# Allegro board C074P02-IPCAM-G1-B01.brd
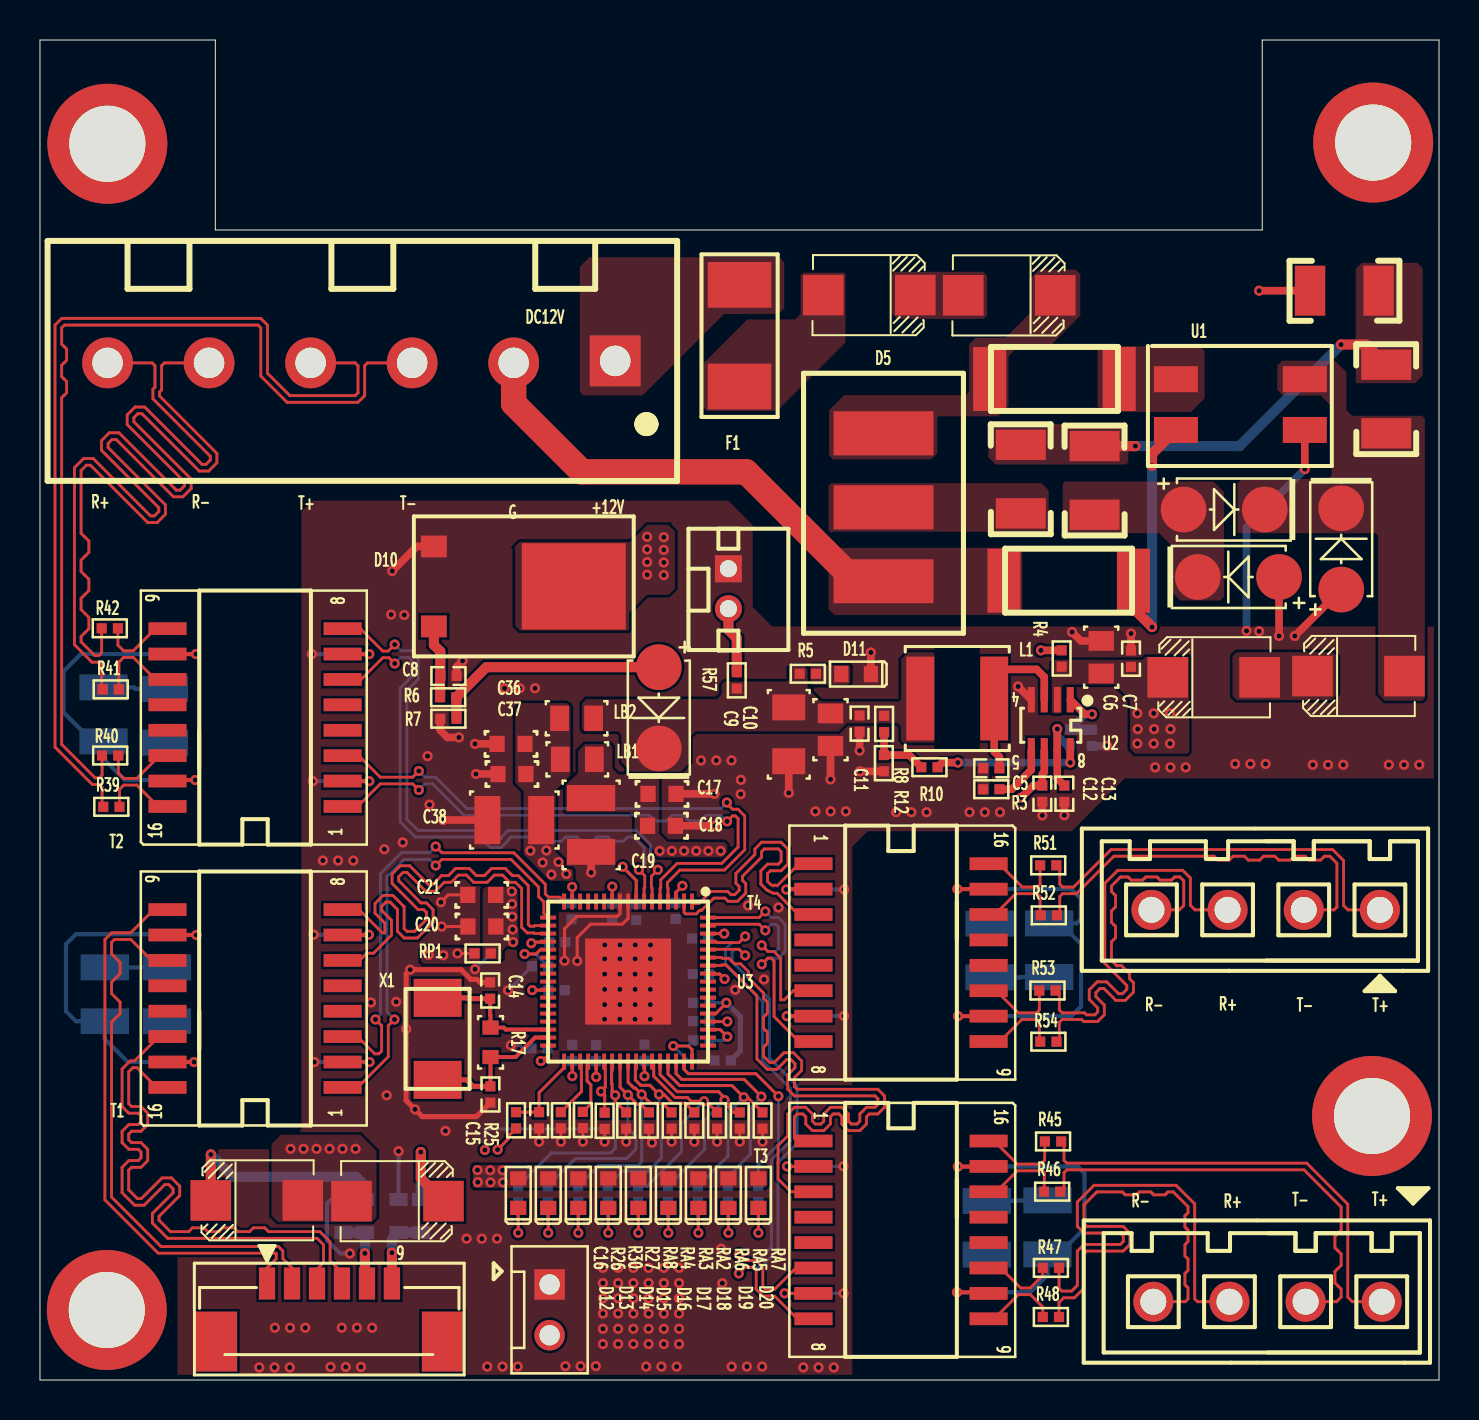
[diagram p0: board, top side]
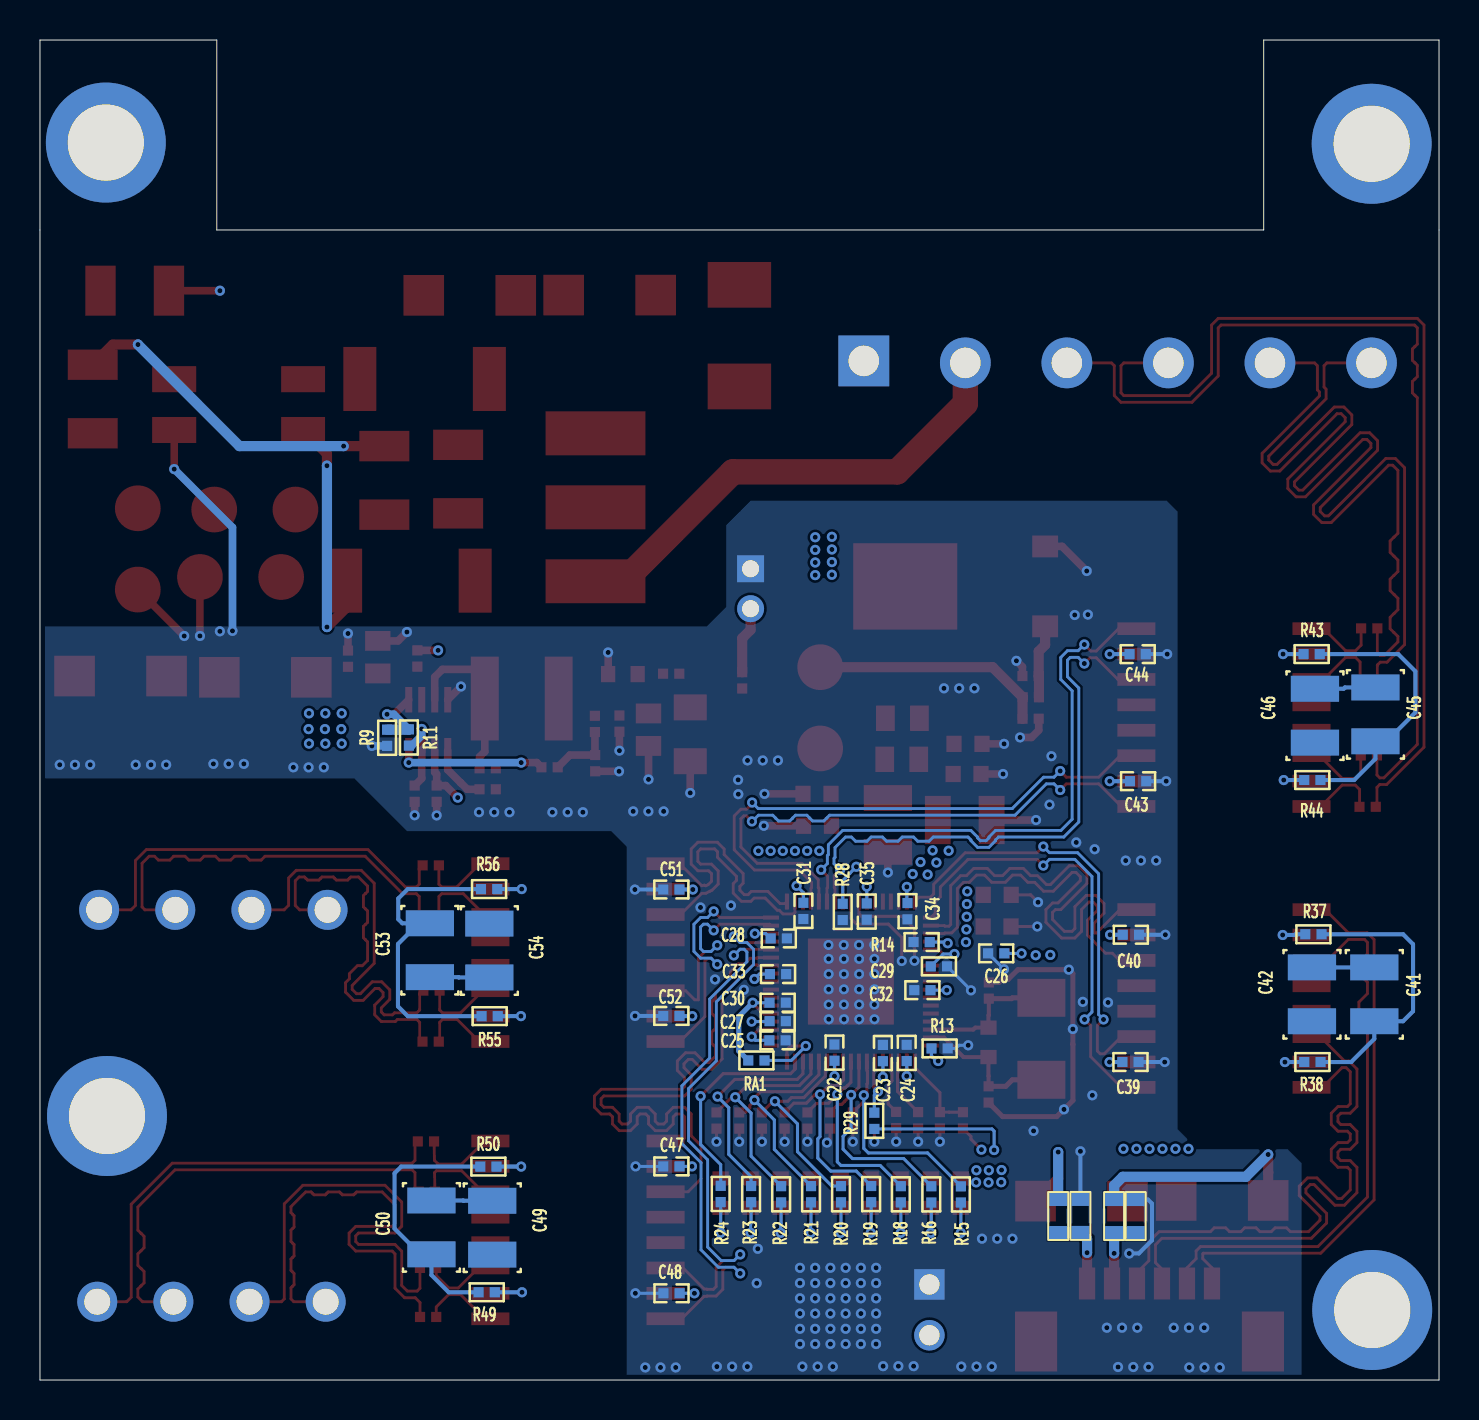
[diagram p1: board, bottom side, seen from below]

Outline 70 x 67 mm; copper layers: TOP, GND, POWER, BOTTOM. Coordinates in mm from the lower left corner of the outline.
Outline path: 0,67 0,0 70,0 70,67 61.15,67 61.15,57.5 8.77,57.5 8.77,67 0,67

## Design rules (mm)
net group MDI0+: nets MDI0+ MDI0P
net group MDI0-: nets MDI0- MDI0N
net group MDI1+: nets MDI1+ MDI1P
net group MDI1-: nets MDI1- MDI1N
net group N17440667: nets N17440661 N17440667
net group N17440679: nets N17440679 N17440691
net group N17440699: nets N17440673 N17440701
net group PRX+1: nets PRX1P PRX+1
net group PRX+2: nets PRX2P PRX+2
net group PRX-1: nets PRX1N PRX-1
net group PRX-2: nets PRX2N PRX-2
net group PTX+1: nets PTX1P PTX+1
net group PTX+2: nets PTX2P PTX+2
net group PTX-1: nets PTX1N PTX-1
net group PTX-2: nets PTX2N PTX-2
net group TRX1: nets RXIM1 RXIP1
net group PRTX5: nets PRX+5 PRX-5 PTX+5 PTX-5
net group RTX3: nets RXIM3 RXIP3 TXOM3 TXOP3
net group RTX5: nets RXIM5 RXIP5 TXOM5 TXOP5

## Placement (name value [footprint] x y rotation side)
C1  1NF/2KV  [1210]  67.36 47.34 90 top
C2  1NF/2KV  [1210]  49.08 43.33 90 top
C3  1NF/2KV  [1210]  52.77 43.27 90 top
C4  1NF/2KV  [1210]  66.97 54.47 180 top
C5  100NF  [SC0402]  47.6 30.58 0 top
C6  22UF  [SC0805]  53.1 36.14 90 top
C7  100NF  [SC0402]  54.59 36.07 90 top
C8  100NF/25V  [SC0402]  20.44 35.2 0 top
C9  47UF  [SC1206]  37.47 32.28 270 top
C10  22UF  [SC0805]  39.55 32.51 270 top
C11  100NF  [SC0402]  41.01 32.82 270 top
C12  100NF/NC  [SC0402]  50.15 29.31 270 top
C13  100NF  [SC0402]  51.25 29.31 270 top
C14  30PF  [SC0402]  22.52 19.47 270 top
C15  30PF  [SC0402]  22.54 14.28 90 top
C16  100NF  [SC0402]  24.97 12.99 90 top
C17  100NF  [SC0603]  31.12 29.31 0 top
C18  22uF  [SC0603]  31.1 27.71 0 top
C19  47UF  [SC1210]  27.58 27.75 270 top
C20  100NF  [SC0603]  22.11 22.67 180 top
C21  10UF/NC  [SC0603]  22.1 24.26 180 top
C22  100NF  [SC0402]  30.25 16.37 90 bottom
C23  100NF  [SC0402]  27.83 16.35 90 bottom
C24  100NF  [SC0402]  26.63 16.36 90 bottom
C25  100NF  [SC0402]  33.1 16.98 180 bottom
C26  100NF  [SC0402]  22.16 21.33 0 bottom
C27  100NF  [SC0402]  33.09 17.94 180 bottom
C28  100NF  [SC0402]  33.04 22.08 180 bottom
C29  100NF  [SC0402]  25.89 21.9 0 bottom
C30  100NF  [SC0402]  33.09 18.86 180 bottom
C31  100NF  [SC0402]  31.8 23.45 270 bottom
C32  100NF  [SC0402]  25.85 19.49 0 bottom
C33  100NF  [SC0402]  33.07 20.29 180 bottom
C34  100NF  [SC0402]  26.6 23.44 270 bottom
C35  100NF  [SC0402]  28.63 23.42 270 bottom
C36  100NF  [SC0603]  23.57 31.81 180 top
C37  22uF  [SC0603]  23.61 30.3 180 top
C38  47UF  [SC1210]  23.73 28 180 top
C39  100NF  [SC0402]  15.44 15.9 0 bottom
C40  100NF  [SC0402]  15.42 22.26 0 bottom
C41  1NF/2KV  [SC1210]  3.24 19.28 270 bottom
C42  1NF/2KV  [SC1210]  6.36 19.28 90 bottom
C43  100NF  [SC0402]  15.06 29.94 0 bottom
C44  100NF  [SC0402]  15.08 36.29 0 bottom
C45  1NF/2KV  [SC1210]  3.18 33.28 270 bottom
C46  1NF/2KV  [SC1210]  6.21 33.22 90 bottom
C47  100NF  [SC0402]  38.41 10.68 180 bottom
C48  100NF  [SC0402]  38.4 4.34 180 bottom
C49  1NF/2KV  [SC1210]  50.41 7.63 270 bottom
C50  1NF/2KV  [SC1210]  47.37 7.61 90 bottom
C51  100NF  [SC0402]  38.41 24.52 180 bottom
C52  100NF  [SC0402]  38.41 18.2 180 bottom
C53  1NF/2KV  [SC1210]  50.49 21.49 90 bottom
C54  1NF/2KV  [SC1210]  47.52 21.47 270 bottom
D1  SS36-A  [SMB]  41.5 54.25 0 top
D2  SS36-A  [SMB]  48.5 54.23 0 top
D3  SS36-A  [SMB]  65.97 35.2 180 top
D4  SS36-A  [SMB]  58.72 35.13 180 top
D5  -  [B3D090L]  42.2 47.34 270 top
D6  SMBJ26CA  [SMA]  59.25 43.52 0 top
D7  SMBJ26CA  [SMA]  65.11 41.55 90 top
D8  SMBJ26CA  [SMA]  59.96 40.15 180 top
D9  BZT52C3V3  [SMA]  30.96 33.61 270 top
D10  BT151S-500R  [D-PACK]  26.71 39.68 270 top
D11  Led-G-0603  [LED0603]  40.84 35.3 180 top
D12  LED  [LED0603]  23.93 9.34 90 top
D13  LED  [LED0603]  25.43 9.34 90 top
D14  LED  [LED0603]  26.93 9.34 90 top
D15  LED  [LED0603]  28.44 9.34 90 top
D16  LED  [LED0603]  29.94 9.34 90 top
D17  LED  [LED0603]  31.44 9.34 90 top
D18  LED  [LED0603]  32.94 9.34 90 top
D19  LED  [LED0603]  34.44 9.34 90 top
D20  LED  [LED0603]  35.95 9.34 90 top
D21  SS36  [SMB]  10.85 8.98 180 top
D22  SS36  [SMB]  17.89 8.94 0 top
F1  PTC FC-1.5A  [SF6127]  35 52.22 270 top
J1  HEADER 6  [CON-1X6P-508-KF127S]  16.08 50.36 0 top
J2  KF127-2P  [CON1X2PD254]  25.5 2.24 270 top
J3  HEADER 6  [A1251WV-S-6P]  16.36 4.82 180 top
J4  CON4  [CON1X4PD3_81-180]  65.23 3.91 180 top
J5  CON4  [CON1X4PD3_81-180]  65.14 23.51 180 top
J6  -  [PH-2P]  34.44 40.56 270 top
L1  4.7UH  [SPL0505L]  45.9 34.07 180 top
LB1  MGLB2012_220T_LF  [SL0805]  26.88 31.03 0 top
LB2  MGLB2012_220T_LF  [SL0805]  26.85 33.09 180 top
LB3  120R-100MHz  [L0603]  15.18 8.2 90 bottom
LB4  120R-100MHz/NC  [L0603]  16.26 8.2 90 bottom
LB5  120R-100MHz  [L0603]  19.06 8.2 90 bottom
LB6  120R-100MHz/NC  [L0603]  17.94 8.2 90 bottom
M1  NC  [HOLE6C3_5MM]  3.37 61.81 0 top
M2  NC  [HOLE6C3_5MM]  66.71 61.87 0 top
M3  NC  [HOLE6C3_5MM]  66.65 13.2 0 top
M4  NC  [HOLE6C3_5MM]  3.34 3.5 0 top
R1  0R  [SR2512]  50.76 50.05 0 top
R2  0R  [SR2512]  51.47 39.97 0 top
R3  10R  [SR0402]  47.6 29.54 180 top
R4  100K  [SR0402]  51.12 36.08 90 top
R5  1K  [SR0402]  38.42 35.31 0 top
R6  100R  [SR0402]  20.42 34.14 180 top
R7  100R  [SR0402]  20.43 33.06 0 top
R8  40.2K  [SR0402]  42.24 32.8 270 top
R9  100K  [SR0402]  51.54 32.13 90 bottom
R10  33K  [SR0402]  44.5 30.64 180 top
R11  10K  [SR0402]  52.63 32.11 270 bottom
R12  13K  [SR0402]  42.22 30.84 270 top
R13  0R/NC  [SR0402]  24.99 16.58 180 bottom
R14  0R/NC  [SR0402]  25.02 20.68 180 bottom
R15  75R  [SR0402]  23.92 9.28 270 bottom
R16  75R  [SR0402]  25.4 9.28 270 bottom
R17  1M  [SR0603]  22.54 16.88 270 top
R18  75R  [SR0402]  26.93 9.29 270 bottom
R19  75R  [SR0402]  28.41 9.29 270 bottom
R20  75R  [SR0402]  29.92 9.29 270 bottom
R21  75R  [SR0402]  31.42 9.29 270 bottom
R22  75R  [SR0402]  32.92 9.29 270 bottom
R23  75R  [SR0402]  34.42 9.29 270 bottom
R24  75R  [SR0402]  35.94 9.3 270 bottom
R25  470K  [SR0402]  23.82 12.98 90 top
R26  0R  [SR0402]  27.16 13 90 top
R27  NC/4.7K  [SR0402]  28.25 12.96 270 top
R28  6.2K  [SR0402]  29.83 23.4 270 bottom
R29  4.7K/NC  [SR0402]  28.25 12.96 270 bottom
R30  4.7K/NC  [SR0402]  26.06 12.99 270 top
R37  75R  [SR0402]  6.28 22.29 180 bottom
R38  75R  [SR0402]  6.33 15.9 180 bottom
R39  2.2R  [SR0402]  3.57 28.66 0 top
R40  2.2R  [SR0402]  3.51 31.22 0 top
R41  2.2R  [SR0402]  3.54 34.53 0 top
R42  2.2R  [SR0402]  3.49 37.58 0 top
R43  75R  [SR0402]  6.37 36.3 180 bottom
R44  75R  [SR0402]  6.34 30 180 bottom
R45  2.2R  [SR0402]  50.69 11.93 0 top
R46  2.2R  [SR0402]  50.65 9.42 0 top
R47  2.2R  [SR0402]  50.58 5.61 0 top
R48  2.2R  [SR0402]  50.58 3.15 0 top
R49  75R  [SR0402]  47.65 4.39 0 bottom
R50  75R  [SR0402]  47.56 10.67 0 bottom
R51  2.2R  [SR0402]  50.45 25.73 0 top
R52  2.2R  [SR0402]  50.47 23.23 0 top
R53  2.2R  [SR0402]  50.41 19.47 0 top
R54  2.2R  [SR0402]  50.45 16.92 0 top
R55  75R  [SR0402]  47.5 18.19 0 bottom
R56  75R  [SR0402]  47.53 24.55 0 bottom
R57  1K  [SR0402]  34.86 34.98 90 top
RA1  NC(4.7K)  [SR0402]  34.16 15.98 0 bottom
RA2  NC(4.7K)  [SR0402]  32.74 12.97 270 top
RA3  NC(4.7K)  [SR0402]  31.6 12.97 270 top
RA4  NC(4.7K)  [SR0402]  30.47 12.97 270 top
RA5  NC(4.7K)  [SR0402]  35.01 12.97 270 top
RA6  NC(4.7K)  [SR0402]  33.88 12.97 270 top
RA7  NC(4.7K)  [SR0402]  36.15 12.97 270 top
RA8  NC(4.7K)  [SR0402]  29.33 12.97 270 top
RP1  0R  [SR0402]  22.15 21.33 0 top
T1  H1102L  [STFM16-50-285]  10.76 19.08 90 top
T2  H1102L  [STFM16-50-285]  10.76 33.12 90 top
T3  H1102L  [STFM16-50-285]  43.08 7.51 270 top
T4  H1102L  [STFM16-50-285]  43.08 21.37 270 top
U1  SF0905100YL  [SF0905250YL-1]  56.84 47.5 0 top
U2  MP1495S  [TSOT23-8]  50.57 32.74 180 top
U3  IP178G  [QFN68-178]  29.43 19.92 270 top
X1  NX5032GB-25.000M-STD-CSK-5  [5032]  19.9 17.06 0 top

## Library data of the parts
C1-C4 = C_3: room: 1
C5 C7 C11-C13 = C: room: 1; signal model: DEFAULT_CAPACITOR_100000pF_1_2
C6 C10 = C: room: 1; signal model: DEFAULT_CAPACITOR_2.2e+07pF_1_2
C8 = C_4: room: 1
C9 = C: room: 1; signal model: DEFAULT_CAPACITOR_4.7e+07pF_1_2
C14-C38 = C-0603: room: 2
C39-C42 = CAP_NP: room: 2
C43-C54 = CAP_NP: room: 3
D1-D4 = D_A_0: room: 1
D5 = CON3: room: 1
D6-D8 = DZ3_0: room: 1
D9 = BZX84C10/SOT_0: room: 1
D10 = BZX84C10/SOT_2: room: 1
D11 = LED_1: room: 1
D12-D19 = LL4148_1: room: 2
D20 = LL4148_2: room: 2
D21 D22 = BZX84C10/SOT_0: room: 2
F1 = FS-A: room: 1
J1 = HEADER 6: room: 1
J2 = CON2: Tolerance: #TOL; User Part Number: HAMP; room: 1
J3 = HEADER 6: room: 2
J4 J5 = CON4: room: 3
J6 = CON2: room: 1
L1 = L: room: 1; signal model: DEFAULT_INDUCTOR_4.7e-06nH_1_2
LB1 LB2 = LB: room: 2
LB3-LB6 = BEAD: room: 2
M1-M4 = ID-BOARD_1: room: 1
R1 R2 = R: room: 1
R3 = R: room: 1; signal model: DEFAULT_RESISTOR_10.000000OHM_1_2
R4 R9 = R: room: 1; signal model: DEFAULT_RESISTOR_100000OHM_1_2
R5-R7 R57 = R-0603: room: 1
R8 = R: room: 1; signal model: DEFAULT_RESISTOR_121000OHM_1_2
R10 = R: room: 1; signal model: DEFAULT_RESISTOR_33000OHM_1_2
R11 = R: room: 1; signal model: DEFAULT_RESISTOR_11300OHM_1_2
R12 = R: room: 1; signal model: DEFAULT_RESISTOR_39200OHM_1_2
R13 R14 = Resistor_0: room: 2
R15 R16 R18-R30 RP1 = R_4: room: 2
R17 = R-0603: room: 2
R37 R38 = Resistor: room: 2
R39-R42 = R: signal model: DEFAULT_RESISTOR_220.000000OHM_1_2; room: 3
R43 R44 R49 R50 R55 R56 = Resistor: room: 3
R45-R48 R51-R54 = Resistor: signal model: RESISTOR_SR0402_2.2R_2.2R; room: 3
RA1-RA8 = R_3: room: 2
T1 = 000-7090-37R_1: room: 2
T2-T4 = 000-7090-37R_1: room: 3
U1 = CON4A_0: room: 1
U2 = MP1494S_0: room: 1
U3 = IP178GA_11: Tolerance: RichardLC; room: 2
X1 = Crystal4_1: room: 2

## Footprints (pads in the part's own frame, mm; a bottom-side part is the same pattern mirrored in y, then rotated)
1210
  rect 1.519x2.499 smd: 1(0,0) 2(3.429,0)
5032
  rect 2.4x1.9 smd: 1(0,2.05) 2(0,-2.05)
A1251WV-S-6P
  rect 2.108x2.997 smd: (-3.8,2.901) (7.549,2.901)
  rect 0.813x1.6 smd: 1(4.999,0) 2(3.749,0) 3(2.499,0) 4(1.25,0) 5(0,0) 6(-1.25,0)
B3D090L
  rect 2.2x4.999 smd: 1(0,0) 2(3.701,0) 3(7.399,0)
CON1X2PD254
  rect 1.524x1.524 hole 1.016: 1(-2.54,0)
  round 1.524 hole 1.016: 2(0,0)
CON1X4PD3_81-180
  round 1.999 hole 1.3: 1(-1.905,0) 2(1.905,0) 3(5.715,0) 4(9.525,0)
CON-1X6P-508-KF127S
  rect 2.54x2.54 hole 1.524: 1(12.7,0.599)
  round 2.54 hole 1.524: 2(7.62,0.5) 3(2.54,0.5) 4(-2.54,0.5) 5(-7.62,0.5) 6(-12.7,0.5)
D-PACK
  rect 1.092x1.295 smd: 1(-1.999,-7) 3(1.999,-7)
  rect 4.321x5.21 smd: 2(0,0)
HOLE6C3_5MM
  round 5.999 hole 3.81: 1(0,0)
L0603
  rect 0.65x0.899 smd: 1(-0.826,0) 2(0.826,0)
LED0603
  rect 0.711x0.813 smd: A(0.737,0) C(-0.737,0)
PH-2P
  rect 1.349x1.349 hole 0.851: 1(0,0)
  round 1.351 hole 0.851: 2(1.999,0)
QFN68-178
  rect 0.8x0.201 smd: 1(-4,3.2) 2(-4,2.799) 3(-4,2.4) 4(-4,1.999) 5(-4,1.6) 6(-4,1.199) 7(-4,0.8) 8(-4,0.401) 9(-4,0) 10(-4,-0.401) 11(-4,-0.8) 12(-4,-1.199) 13(-4,-1.6) 14(-4,-1.999) 15(-4,-2.4) 16(-4,-2.799) 17(-4,-3.2) 35(4,-3.2) 36(4,-2.799) 37(4,-2.4) 38(4,-1.999) 39(4,-1.6) 40(4,-1.199) 41(4,-0.8) 42(4,-0.401) 43(4,0) 44(4,0.401) 45(4,0.8) 46(4,1.199) 47(4,1.6) 48(4,1.999) 49(4,2.4) 50(4,2.799) 51(4,3.2)
  rect 0.201x0.8 smd: 18(-3.2,-4) 19(-2.799,-4) 20(-2.4,-4) 21(-1.999,-4) 22(-1.6,-4) 23(-1.199,-4) 24(-0.8,-4) 25(-0.401,-4) 26(0,-4) 27(0.401,-4) 28(0.8,-4) 29(1.199,-4) 30(1.6,-4) 31(1.999,-4) 32(2.4,-4) 33(2.799,-4) 34(3.2,-4) 52(3.2,4) 53(2.799,4) 54(2.4,4) 55(1.999,4) 56(1.6,4) 57(1.199,4) 58(0.8,4) 59(0.401,4) 60(0,4) 61(-0.401,4) 62(-0.8,4) 63(-1.199,4) 64(-1.6,4) 65(-1.999,4) 66(-2.4,4) 67(-2.799,4) 68(-3.2,4)
  rect 4.3x4.3 smd: 69(0,0)
SC0402
  rect 0.508x0.508 smd: 1(-0.406,0) 2(0.406,0)
SC0603
  rect 0.762x0.813 smd: 1(-0.699,0) 2(0.699,0)
SC0805
  rect 0.991x1.27 smd: 1(-0.813,0) 2(0.813,0)
SC1206
  rect 1.295x1.651 smd: 1(-1.346,0) 2(1.346,0)
SC1210
  rect 1.295x2.413 smd: 1(-1.346,0) 2(1.346,0)
SF6127
  rect 2.286x3.175 smd: 1(-2.54,0) 2(2.54,0)
SF0905250YL-1
  rect 2.2x1.3 smd: 1(0,0) 2(0,2.54) 3(6.449,2.54) 4(6.449,0)
SL0805
  rect 0.94x1.27 smd: 1(-0.851,0) 2(0.851,0)
SMA
  round 2.286 smd: 1(-2.032,0) 2(2.032,0)
SMB
  rect 2.032x2.032 smd: 1(-2.301,0) 2(2.301,0)
SPL0505L
  rect 1.397x4.191 smd: 1(-1.849,0) 2(1.849,0)
SR0402
  rect 0.508x0.508 smd: 1(-0.406,0) 2(0.406,0)
SR0603
  rect 0.711x0.813 smd: 1(-0.737,0) 2(0.737,0)
SR2512
  rect 1.651x3.2 smd: 1(-3.241,0) 2(3.241,0)
STFM16-50-285
  rect 0.635x1.905 smd: 1(-4.445,-4.381) 2(-3.175,-4.381) 3(-1.905,-4.381) 4(-0.635,-4.381) 5(0.635,-4.381) 6(1.905,-4.381) 7(3.175,-4.381) 8(4.445,-4.381) 9(4.445,4.381) 10(3.175,4.381) 11(1.905,4.381) 12(0.635,4.381) 13(-0.635,4.381) 14(-1.905,4.381) 15(-3.175,4.381) 16(-4.445,4.381)
TSOT23-8
  rect 0.356x1.27 smd: 1(-0.975,-1.275) 2(-0.325,-1.275) 3(0.325,-1.275) 4(0.975,-1.275) 5(0.975,1.275) 6(0.325,1.275) 7(-0.325,1.275) 8(-0.975,1.275)

## Nets
3V3_BD: C9.1(A) C10.1(A) C11.1(A) D9.2(ANODE) L1.2(B) LB2.1 R5.1 R8.1(A) R57.1
12V0: C6.1(A) C7.1(A) D4.2(K) D10.2 D21.1(CATHODE) D22.1(CATHODE) J2.2 R4.1(A) U2.2(IN)
AV10: C24.1 C25.1 C26.1 RP1.1 U3.36(DVDD#36) U3.54(DVDD#54)
AVCC: C30.1 C31.1 C32.1 C33.1 C34.1 C35.1 C36.1 C37.1 C38.1 LB1.1 LB2.2 RA1.2 U3.3(AV33#3) U3.11(PLLVCC) U3.16(AV33#16) U3.27(AV33#27) U3.56(PVDD_LDO) U3.61(AV33#61)
DVCC: C17.1 C18.1 C19.1 C22.1 C23.1 D12.A(ANODE) D13.A(ANODE) D14.A(ANODE) D15.A(ANODE) D16.A(ANODE) D17.A(ANODE) D18.A(ANODE) D19.A(ANODE) D20.A(ANODE) LB1.2 R25.1 R29.2 U3.39(PVDD#39) U3.45(PVDD#45)
GND: C4.2(B) C6.2(B) C7.2(B) C8.2(B) C9.2(B) C10.2(B) C11.2(B) C12.2(B) C13.2(B) C14.1 C15.1 C16.1 C17.2 C18.2 C19.2 C20.2 C21.2 C22.2 C23.2 C24.2 C25.2 C26.2 C27.2 C28.2 C29.2 C30.2 C31.2 C32.2 C33.2 C34.2 C35.2 C36.2 C37.2 C38.2 C39.1 C40.1 C43.1 C44.1 C47.1 C48.1 C51.1 C52.1 D7.1(A) D8.1(A) D10.1 D11.C J2.1 J6.1 LB3.2 LB6.2 R7.1 R11.2(B) R12.2(B) R13.2 R14.2 R26.1 R27.2 R28.2 R30.2 RA2.2 RA3.2 RA4.2 RA5.2 RA6.2 RA7.2 RA8.2 U1.4 U2.4(GND) U3.9(BGGND) U3.10(PLLGND) U3.69(E-PAD GND)
VIN+: F1.1 J1.1
VIN-: D5.3 J1.2 R2.1(A)
AFT: R27.1 R29.1 U3.40(AUTO_FACTORY_TEST)
BF_STM_DIS: R21.1 RA5.1 U3.47(LINK_LED3/SCLK/BF_STM_DIS)
COS_DIS: R22.1 RA7.1 U3.48(LINK_LED2/SDATA/COS_DIS)
F_POWER_OFF: R30.1 U3.37(F_POWER_OFF)
FX_DUPLEX6: R24.1 U3.50(LINK_LED0/FX_DUPLEX6)
FX_DUPLEX7: R23.1 U3.49(LINK_LED1/FX_DUPLEX7)
HI_PRI[0]: R19.1 RA2.1 U3.44(LINK_LED5/HI_PRI[0])
HI_PRI[1]: R18.1 RA3.1 U3.43(LINK_LED6/HI_PRI[1])
HI_PRI[2]: R16.1 RA4.1 U3.42(LINK_LED7/HI_PRI[2])
LED0: D20.C(CATHODE) R24.2
LED1: D19.C(CATHODE) R23.2
LED2: D18.C(CATHODE) R22.2
LED3: D17.C(CATHODE) R21.2
LED4: D16.C(CATHODE) R20.2
LED5: D15.C(CATHODE) R19.2
LED6: D14.C(CATHODE) R18.2
LED7: D13.C(CATHODE) R16.2
MDC: U3.52(SCL/MDC)
MDI0+: J1.4 R39.1(A)
MDI0-: J1.3 R40.1(A)
MDI0N: R40.2(B) T2.14(TX-)
MDI0P: R39.2(B) T2.16(TX+)
MDI1+: J1.6 R41.1(A)
MDI1-: J1.5 R42.1(A)
MDI1N: R42.2(B) T2.9(RX-)
MDI1P: R41.2(B) T2.11(RX+)
MDIO: U3.53(SDA/MDIO)
PRX1N: R48.1 T3.9(RX-)
PRX1P: R47.1 T3.11(RX+)
PRX2N: R54.1 T4.9(RX-)
PRX2P: R53.1 T4.11(RX+)
PRX+1: J4.3 R47.2
PRX+2: J5.3 R53.2
PRX+5: J3.2 T1.11(RX+)
PRX-1: J4.4 R48.2
PRX-2: J5.4 R54.2
PRX-5: J3.1 T1.9(RX-)
PTX1N: R46.1 T3.14(TX-)
PTX1P: R45.1 T3.16(TX+)
PTX2N: R52.1 T4.14(TX-)
PTX2P: R51.1 T4.16(TX+)
PTX+1: J4.1 R45.2
PTX+2: J5.1 R51.2
PTX+5: J3.4 T1.16(TX+)
PTX-1: J4.2 R46.2
PTX-2: J5.2 R52.2
PTX-5: J3.3 T1.14(TX-)
PTX-6: R14.1 U3.22(FXSD6)
PTX-7: R13.1 U3.34(FXSD7)
REG_OUT: C20.1 C21.1 C27.1 C28.1 C29.1 RP1.2 U3.21(AV10#21) U3.55(VREG_LDO) U3.66(AV10#66)
RESET: C16.2 R25.2 U3.35(RESETB)
RSVD_GMAC_FILTER: R20.1 RA6.1 U3.46(LINK_LED4/RSVD_GMAC_FILTER)
RXIM0: U3.58(RXIM0)
RXIM1: T3.8(RD-) U3.64(RXIM1)
RXIM2: T4.8(RD-) U3.68(RXIM2)
RXIM3: T2.8(RD-) U3.6(RXIM3)
RXIM4: U3.13(RXIM4)
RXIM5: T1.8(RD-) U3.19(RXIM5)
RXIM6: U3.24(RXIM6)
RXIM7: U3.30(RXIM7)
RXIP0: U3.57(RXIP0)
RXIP1: T3.6(RD+) U3.65(RXIP1)
RXIP2: T4.6(RD+) U3.67(RXIP2)
RXIP3: T2.6(RD+) U3.7(RXIP3)
RXIP4: U3.12(RXIP4)
RXIP5: T1.6(RD+) U3.20(RXIP5)
RXIP6: U3.23(RXIP6)
RXIP7: U3.31(RXIP7)
TXOM0: U3.60(TXOM0)
TXOM1: T3.3(TD-) U3.62(TXOM1)
TXOM2: T4.3(TD-) U3.2(TXOM2)
TXOM3: T2.3(TD-) U3.4(TXOM3)
TXOM4: U3.15(TXOM4)
TXOM5: T1.3(TD-) U3.17(TXOM5)
TXOM6: U3.26(TXOM6)
TXOM7: U3.28(TXOM7)
TXOP0: U3.59(TXOP0)
TXOP1: T3.1(TD+) U3.63(TXOP1)
TXOP2: T4.1(TD+) U3.1(TXOP2)
TXOP3: T2.1(TD+) U3.5(TXOP3)
TXOP4: U3.14(TXOP4)
TXOP5: T1.1(TD+) U3.18(TXOP5)
TXOP6: U3.25(TXOP6)
TXOP7: U3.29(TXOP7)
VLAN_DIS: R15.1 RA8.1 U3.41(F_POWER_OFF_LED/VLAN_DIS)
WOL: RA1.1 U3.51(WOL)
X1: C14.2 R17.1 U3.32(OSCI) X1.1
X2: C15.2 R17.2 U3.33(X2) X1.2
N17412153: R28.1 U3.8(BGRES)
N17412700: D12.C(CATHODE) R15.2
N17412952: R26.2 U3.38(TEST1)
N17433481: C43.2 T2.2(CTD)
N17433488: C44.2 T2.7(CRD)
N17434052: C51.2 T4.2(CTD)
N17434056: C52.2 T4.7(CRD)
N17434086: R56.1 T4.15(CTX)
N17434090: R55.1 T4.10(CRX)
N17434094: C53.2 R55.2 R56.2
N17434100: C49.2 R49.2 R50.2
N17434102: C47.2 T3.2(CTD)
N17434108: C48.2 T3.7(CRD)
N17434132: R50.1 T3.15(CTX)
N17434136: R49.1 T3.10(CRX)
N17434150: C49.1 C50.2
N17434164: C53.1 C54.2
N17436281: C41.2 R37.2 R38.2
N17436283: C39.2 T1.2(CTD)
N17436287: C40.2 T1.7(CRD)
N17436311: R38.1 T1.15(CTX)
N17436315: R37.1 T1.10(CRX)
N17436327: C41.1 C42.2
N17440593: C12.1(A) R4.2(B) U2.6(EN/SYNC)
N17440661: R10.1(A) U2.8(FB)
N17440667: R8.2(B) R10.2(B) R12.1(A)
N17440673: R3.1(A) U2.5(BST)
N17440679: R9.2(B) R11.1(A) U2.1(AAM)
N17440691: C13.1(A) R9.1(A) U2.7(VCC)
N17440699: C5.1(A) R3.2(B)
N17440701: C5.2(B) L1.1(A) U2.3(SW)
N17440954: D11.A R5.2
N17466864: D2.2(K) D5.1 R1.1(A)
N17475095: D3.2(K) D4.1(A)
N17475102: C1.1(A) D3.1(A) D6.2(B) D7.2(B) U1.3
N17502744: C8.1(A) D10.3 R6.2
N17502755: D9.1(CATHODE) R6.1 R7.2
N17504821: C45.2 R43.2 R44.2
N17504827: R44.1 T2.15(CTX)
N17504829: R43.1 T2.10(CRX)
N17504837: C45.1 C46.2
N17505926: J3.5 LB3.1 LB4.1
N17505929: J3.6 LB5.1 LB6.1
N17505945: D21.2(ANODE) LB4.2
N17510151: D22.2(ANODE) LB5.2
N18156035: R2.2(B) U1.1
N18156037: C1.2(B) C2.2(B) C3.2(B) C4.1(A)
N18156088: R1.2(B) U1.2
N18156107: C2.1(A) D5.2
N18156167: C3.1(A) D6.1(A) D8.2(B)
N18169099: D1.1(A) F1.2
N174253271: D1.2(K) D2.1(A)
N175169961: J6.2 R57.2

Pads without a net: C42 1; C46 1; C50 1; C54 1; M1 1; M2 1; M3 1; M4 1; T1 4 5 12 13; T2 4 5 12 13; T3 4 5 12 13; T4 4 5 12 13

## Via types
v1: diameter 0.508, hole 0.254, TOP to BOTTOM, 332 vias

## Routing (per net, layer and track width the routed paths; a pad name or vN(x,y) marks a point on that pad's centre or on a via; arc(x,y) is an arc through that point)
12V0:
  vias: v1(12.54,11.56) v1(13.19,11.56) v1(13.84,11.56) v1(14.49,11.56) v1(15.14,11.56) v1(15.79,11.56) v1(30.38,42.16) v1(30.38,41.53) v1(30.38,40.9) v1(30.38,40.26) v1(31.21,42.14) v1(31.21,41.51) v1(31.21,40.88) v1(31.21,40.24) v1(54.9,33.33) v1(54.92,32.55) v1(54.9,31.82) v1(55.72,33.33) v1(55.74,32.55) v1(55.72,31.82) v1(56.54,33.33) v1(56.56,32.55) v1(56.54,31.82)
AV10: length 5.3
  TOP w0.152: U3.36 26.63,15.91 v1(26.63,15.19) ; U3.54 34.03,17.52 v1(34.39,17.17) ; RP1.1 v1(20.89,21.33)
  BOTTOM w0.152: C25.1 34.21,16.98 v1(34.39,17.17) ; v1(20.89,21.33) 21.74,21.33 C26.1 ; C24.1 v1(26.63,15.19)
  vias: v1(19.45,21.25) v1(20.18,21.24)
AVCC: length 13.9
  TOP w0.152: v1(28.63,24.67) 28.63,23.93 U3.11 ; v1(32.14,24.71) 31.8,24.37 31.8,23.94 U3.3 ; v1(24.63,19.49) 25.4,19.49 U3.27 ; v1(34.34,18.86) 34.34,18.85 33.82,18.32 U3.56 ; U3.16 v1(26.63,24.66) ; v1(34.25,20.05) 34.01,20.29 33.45,20.29 U3.61
  BOTTOM w0.152: v1(34.25,20.05) 34.01,20.29 C33.1 ; v1(32.14,24.71) 31.8,24.37 C31.1 ; C30.1 v1(34.34,18.86) ; C35.1 v1(28.63,24.67) ; C32.1 v1(24.63,19.49) ; C34.1 26.63,23.88 v1(26.63,24.66)
  BOTTOM w0.254: v1(34.34,18.86) 35.04,18.17 35.04,16.45 RA1.2
  vias: v1(24.54,26.46) v1(25.15,25.87) v1(25.34,26.48) v1(25.59,25.27) v1(25.94,25.9) v1(26.33,25.3)
DVCC: length 11.5
  TOP w0.152: U3.45 30.25,15.9 v1(30.25,15.19) ; U3.39 27.83,15.15 v1(27.83,15.15) ; R25.1 23.42,12.18 23.42,12.04 v1(22.9,11.52)
  BOTTOM w0.152: v1(22.26,11.5) 22.26,12.44 22.37,12.55 R29.2 ; C23.1 27.83,15.15 v1(27.83,15.15) ; C22.1 v1(30.25,15.19)
  vias: v1(21.89,10.5) v1(21.9,9.89) v1(22.52,10.49) v1(22.54,9.88) v1(23.15,10.49) v1(23.16,9.88) v1(31.01,26.46) v1(31.62,26.46) v1(32.22,26.46) v1(32.83,26.46) v1(33.44,26.46) v1(34.05,26.46)
GND: length 120.5
  TOP w0.152: RA4.2 30.47,12.03 v1(30.62,11.87) ; U3.9 29.43,23.08 29.14,22.79 27.55,22.79 26.88,22.12 v1(26.88,20.95) ; v1(20.06,23.89) 20.43,24.26 C21.2 ; RA7.2 v1(36.15,11.92) ; R26.1 v1(27.16,11.92) ; RA6.2 v1(33.88,11.92) ; C20.2 v1(20.1,22.67) ; RA2.2 v1(32.74,11.92) ; R30.2 v1(26.06,11.92) ; U3.10 29.02,23.32 28.89,23.18 26.87,23.18 26.25,22.56 v1(26.25,20.96) ; RA3.2 v1(31.6,11.92) ; R27.2 v1(28.25,11.92) ; RA5.2 v1(35.01,11.92) ; RA8.2 v1(29.33,11.92) ; C16.1 v1(24.97,11.92)
  TOP w0.254: C14.1 22.02,19.88 21.87,20.03 21.56,20.03 21.07,20.52 v1(18.52,20.52) 18.32,20.31 v1(18.32,17.55) 18.32,16.78 18.32,16.78 18.32,13.98 v1(18.77,13.53) 19.13,13.17 21.84,13.17 C15.1
  TOP w0.381: C10.2 v1(39.55,30.03) ; v1(20.96,32.13) 20.39,32.13 20.03,32.49 R7.1 ; R12.2 v1(41.03,30.43) ; v1(21.15,35.96) 20.84,35.66 C8.2 ; U1.4 v1(63.28,45.54) ; C19.2 v1(27.58,25.38) ; v1(51.64,37.4) 52.09,36.95 C6.2 ; C4.2 v1(61,54.47) ; C7.2 v1(54.59,37.33) ; C17.2 v1(33.75,29.31) ; D8.1 v1(62,37.2) ; D7.1 v1(62.78,37.2) ; C38.2 v1(20.16,28) ; C18.2 v1(33.78,27.71) ; C36.2 v1(21.76,31.81) ; C12.2 v1(50.15,28.23) ; C37.2 v1(21.81,30.3) ; v1(17.63,40.45) 18.86,41.68 D10.1 ; C13.2 v1(51.25,28.24) ; D11.C v1(41.57,36.38) ; C9.2 v1(37.47,29.35) ; C11.2 v1(41.01,31.47) ; v1(48.94,34.67) 49.6,34.01 U2.4
  POWER w0.381: v1(61,54.47) v1(61,37.43)
  BOTTOM w0.152: v1(21.77,20.54) C26.2 ; C48.1 v1(40.21,4.34) ; v1(23.42,19.48) R14.2 ; R13.2 24.17,16.58 24.02,16.74 v1(23.56,16.74) ; C47.1 v1(40.2,10.68)
  BOTTOM w0.203: C51.1 v1(40.23,24.52) ; C40.1 v1(13.69,22.26) ; C52.1 v1(40.23,18.2) ; C43.1 v1(13.65,29.94) ; v1(15.5,6.33) 15.02,6.33 14.36,6.98 14.36,8.82 14.56,9.02 LB3.2 ; LB6.2 v1(17.94,11.44) ; C39.1 v1(13.73,15.9) ; C44.1 v1(13.6,36.29)
  BOTTOM w0.381: R11.2 v1(53.39,31.7) ; v1(60.37,37.45) 60.37,42.63 v1(63.28,45.54)
  vias: v1(10.97,0.63) v1(11.75,2.61) v1(11.73,0.63) v1(12.51,2.61) v1(12.5,0.63) v1(13.27,2.61) v1(14.15,25.97) v1(14.54,0.65) v1(14.91,25.97) v1(15.1,2.61) v1(15.3,0.65) v1(15.68,25.97) v1(15.86,2.61) v1(16.06,0.65) v1(16.56,18.88) v1(16.62,2.61) v1(17.23,26.54) v1(17.35,14.23) v1(17.57,38.27) v1(17.82,18.91) v1(18.15,26.88) v1(18.23,38.25) v1(19.39,31.19) v1(19.49,28.77) v1(20.29,12.45) v1(21.34,7.07) v1(22.11,7.07) v1(22.38,0.67) v1(22.87,7.07) v1(23.14,0.67) v1(23.25,34.58) v1(23.9,0.67) v1(24.01,34.58) v1(24.77,34.58) v1(26.29,0.69) v1(27.05,0.69) v1(27.81,0.69) v1(28.17,5.61) v1(28.17,4.85) v1(28.17,4.08) v1(28.17,3.32) v1(28.17,2.56) v1(28.17,1.8) v1(28.26,21.75) v1(28.25,21.06) v1(28.25,20.29) v1(28.25,19.53) v1(28.25,18.77) v1(28.25,18.04) v1(28.93,5.61) v1(28.93,4.85) v1(28.93,4.08) v1(28.93,3.32) v1(28.93,2.56) v1(28.93,1.8) v1(29.02,21.75) v1(29.01,21.06) v1(29.01,20.29) v1(29.01,19.53) v1(29.01,18.77) v1(29.01,18.04) v1(29.78,21.75) v1(29.78,21.06) v1(29.78,20.29) v1(29.78,19.53) v1(29.78,18.77) v1(29.77,18.04) v1(29.69,5.61) v1(29.69,4.85) v1(29.69,4.08) v1(29.69,3.32) v1(29.69,2.56) v1(29.69,1.8) v1(30.33,0.67) v1(30.45,5.61) v1(30.45,4.85) v1(30.45,4.08) v1(30.45,3.32) v1(30.45,2.56) v1(30.45,1.8) v1(30.55,21.75) v1(30.54,21.06) v1(30.54,20.29) v1(30.54,19.53) v1(30.54,18.77) v1(30.53,18.04) v1(31.09,0.67) v1(31.21,5.61) v1(31.21,4.85) v1(31.21,4.08) v1(31.21,3.32) v1(31.21,2.56) v1(31.21,1.8) v1(31.85,0.67) v1(31.98,5.61) v1(31.98,4.85) v1(31.98,4.08) v1(31.98,3.32) v1(31.98,2.56) v1(31.98,1.8) v1(33.08,30.98) v1(33.84,30.98) v1(34.08,6.56) v1(34.14,4.84) v1(34.6,30.98) v1(34.61,0.67) v1(34.78,19.51) v1(35.07,30.01) v1(35.06,29.29) v1(35.37,0.67) v1(35.43,23.72) v1(36.13,0.67) v1(36.23,20.03) v1(36.95,23.63) v1(38.19,0.63) v1(38.8,28.43) v1(38.95,0.63) v1(39.56,28.43) v1(39.72,0.63) v1(40.32,28.43) v1(42.84,28.39) v1(43.6,28.39) v1(44.36,28.39) v1(46.51,28.39) v1(47.27,28.39) v1(48.03,28.39) v1(55.8,30.63) v1(56.56,30.63) v1(57.32,30.63) v1(59.8,30.81) v1(60.56,30.81) v1(61.32,30.81) v1(63.69,30.76) v1(64.45,30.76) v1(65.21,30.76) v1(67.49,30.76) v1(68.25,30.76) v1(69.01,30.76)
VIN-: length 24.2
  TOP w1.27: D5.3 40.81,39.94 35.33,45.41 27.12,45.41 23.7,48.82 J1.2
AFT: length 3.9
  TOP w0.152: U3.40 28.29,15.86 28.29,14.64 v1(28.07,14.43) 28.25,14.25 R27.1
  BOTTOM w0.152: R29.1 28.25,14.25 v1(28.07,14.43)
BF_STM_DIS: length 11.1
  TOP w0.152: U3.47 31.03,15.27 31.88,14.42 33.94,14.42 34.25,14.11 v1(34.25,14) 34.25,13.96 34.49,13.73 34.49,13.6 34.71,13.38 RA5.1
  BOTTOM w0.152: R21.1 33.26,11.53 33.26,13 v1(34.25,14)
COS_DIS: length 11.5
  TOP w0.152: RA7.1 35.39,14.14 v1(35.21,14.14) 34.63,14.72 32,14.72 31.42,15.3 U3.48
  BOTTOM w0.152: v1(35.21,14.14) 34.42,13.35 34.42,11.19 R22.1
F_POWER_OFF: length 3
  TOP w0.152: U3.37 27.09,15.85 27.09,14.42 R30.1
FX_DUPLEX6: length 10.6
  TOP w0.152: U3.50 32.22,15.53 32.44,15.32 35.82,15.32 v1(36.95,14.19)
  BOTTOM w0.152: R24.1 35.94,10.77 36.95,11.78 v1(36.95,14.19)
FX_DUPLEX7: length 10.5
  TOP w0.152: v1(36.1,14.17) 35.23,15.03 32.11,15.03 31.83,15.32 U3.49
  BOTTOM w0.152: R23.1 34.42,10.17 35.54,11.28 35.54,13.61 v1(36.1,14.17)
HI_PRI[0]: length 11
  TOP w0.152: U3.44 29.79,15.89 29.79,15 30.06,14.73 30.52,14.73 v1(30.97,14.28) 31.22,14.28 31.66,13.84 32.28,13.84 RA2.1
  BOTTOM w0.152: R19.1 29.16,10.45 30.43,10.45 31.08,11.09 31.08,12.06 30.97,12.17 v1(30.97,14.28)
HI_PRI[1]: length 10.9
  TOP w0.152: RA3.1 31.16,13.82 30.82,13.82 30.81,13.84 30.55,13.84 v1(30.11,14.28) 29.78,14.6 29.72,14.6 29.61,14.71 29.6,14.71 29.43,14.89 U3.43
  BOTTOM w0.152: R18.1 27.96,10.73 29.92,10.73 30.11,10.91 v1(30.11,14.28)
HI_PRI[2]: length 11.3
  TOP w0.152: RA4.1 30.07,13.78 29.89,13.78 29.74,13.92 29.74,13.93 v1(29.42,14.25) 29.41,14.25 29.02,14.64 U3.42
  BOTTOM w0.152: R16.1 26.79,11.07 29.35,11.07 29.82,11.54 29.82,12.18 29.42,12.58 v1(29.42,14.25)
LED0: length 2.8
  TOP w0.152: D20.C v1(35.95,7.36)
  BOTTOM w0.152: v1(35.95,7.36) 35.95,7.82 35.94,7.82 R24.2
LED1: length 2.8
  TOP w0.152: D19.C v1(34.44,7.36)
  BOTTOM w0.152: R23.2 34.42,7.84 34.44,7.82 v1(34.44,7.36)
LED2: length 2.8
  TOP w0.152: D18.C v1(32.94,7.36)
  BOTTOM w0.152: R22.2 32.92,7.84 32.94,7.82 v1(32.94,7.36)
LED3: length 2.8
  TOP w0.152: D17.C v1(31.44,7.36)
  BOTTOM w0.152: R21.2 31.42,7.84 31.44,7.82 v1(31.44,7.36)
LED4: length 2.8
  TOP w0.152: D16.C v1(29.94,7.36)
  BOTTOM w0.152: v1(29.94,7.36) 29.94,7.82 29.92,7.83 R20.2
LED5: length 2.8
  TOP w0.152: D15.C v1(28.44,7.36)
  BOTTOM w0.152: R19.2 28.41,7.84 28.44,7.82 v1(28.44,7.36)
LED6: length 2.8
  TOP w0.152: D14.C v1(26.93,7.36)
  BOTTOM w0.152: R18.2 26.93,7.82 26.93,7.82 v1(26.93,7.36)
LED7: length 2.8
  TOP w0.152: D13.C v1(25.43,7.36)
  BOTTOM w0.152: v1(25.43,7.36) 25.43,7.82 25.4,7.84 R16.2
MDI0+: length 47.5
  TOP w0.142: J1.4 15.77,50.86 15.91,50.71 15.91,49.36 15.77,49.22 12.5,49.22 11.38,50.34 11.38,52.75 11.05,53.08 1.09,53.08 0.75,52.75 0.75,31.64 2.62,29.77 2.96,29.77 3.11,29.63 3.11,28.66 R39.1
MDI0-: length 47.3
  TOP w0.142: J1.3 16.39,50.86 16.25,50.71 16.25,49.22 15.91,48.88 12.36,48.88 11.05,50.2 11.05,52.61 10.91,52.75 1.23,52.75 1.08,52.61 1.08,51.8 1.21,51.67 1.21,51.67 1.33,51.55 1.33,50.98 1.21,50.86 1.21,50.86 1.08,50.74 1.08,50.17 1.21,50.05 1.21,50.05 1.33,49.93 1.33,49.36 1.21,49.24 1.21,49.24 1.08,49.11 1.08,31.78 2.76,30.11 2.96,30.11 3.11,30.25 R40.1
MDI0N: length 3.9
  TOP w0.142: T2.14 5.98,31.22 4.84,30.08 4.19,30.08 3.92,30.35 R40.2
MDI0P: length 3.8
  TOP w0.142: T2.16 5.91,28.68 4.84,29.75 4.19,29.75 3.98,29.53 R39.2
MDI1+: length 46.6
  TOP w0.142: J1.6 5.61,50.86 5.75,50.71 5.75,49.64 5.65,49.54 5.65,49.06 8.52,46.19 8.52,46 8.3,45.78 8.11,45.78 5.24,48.65 4.76,48.65 4.36,48.25 4.36,47.77 7.23,44.9 7.23,44.71 7.01,44.49 6.82,44.49 3.95,47.36 3.47,47.36 3.08,46.97 3.08,46.48 5.94,43.62 5.94,43.42 5.73,43.21 5.53,43.21 2.66,46.07 2.18,46.07 1.72,45.62 1.72,36.77 2.6,35.89 2.94,35.89 3.09,35.75 3.09,34.53 R41.1
MDI1-: length 47
  TOP w0.142: R42.1 3.09,36.37 2.94,36.22 2.74,36.22 2.06,36.91 2.06,37.18 2.25,37.37 2.25,37.37 2.45,37.56 2.45,38.13 2.25,38.32 2.25,38.32 2.06,38.52 2.06,39.09 2.25,39.28 2.25,39.28 2.45,39.47 2.45,40.04 2.25,40.23 2.25,40.23 2.06,40.43 2.06,41 2.25,41.19 2.25,41.19 2.45,41.38 2.45,41.95 2.25,42.14 2.25,42.14 2.06,42.34 2.06,45.48 2.32,45.74 2.52,45.74 5.39,42.87 5.86,42.87 6.28,43.28 6.28,43.76 3.41,46.62 3.41,46.83 3.61,47.03 3.81,47.03 6.68,44.16 7.15,44.16 7.56,44.57 7.56,45.04 4.7,47.91 4.7,48.12 4.9,48.32 5.1,48.32 7.97,45.45 8.44,45.45 8.85,45.86 8.85,46.33 5.98,49.2 5.98,49.4 6.09,49.5 6.09,50.71 6.23,50.86 J1.5
MDI1N: length 3.9
  TOP w0.142: T2.9 5.78,37.57 4.67,36.46 4.18,36.46 3.9,36.74 R42.2
MDI1P: length 4.4
  TOP w0.142: R41.2 3.95,35.9 4.18,36.13 4.67,36.13 5.77,35.03 T2.11
PRX1N: length 4
  TOP w0.142: T3.9 47.74,3.06 48.95,4.27 49.56,4.27 50.17,3.65 R48.1
PRX1P: length 3.8
  TOP w0.142: R47.1 50.18,5.23 49.55,4.6 49.07,4.6 48.07,5.6 T3.11
PRX2N: length 4.1
  TOP w0.142: R54.1 50,16.92 50,17.88 49.86,18.03 49.13,18.03 48.02,16.92 T4.9
PRX2P: length 4
  TOP w0.142: R53.1 50,18.5 49.86,18.36 48.95,18.36 47.85,19.46 T4.11
PRX+1: length 23.5
  TOP w0.142: R47.2 50.99,4.59 51.13,4.45 51.62,4.45 51.9,4.73 51.9,6.44 52.24,6.78 54.06,6.78 54.2,6.92 54.2,7.21 54.06,7.35 52.24,7.35 51.9,7.68 51.9,8.9 52.74,9.74 56.85,9.74 57.77,8.81 57.77,4.06 57.92,3.91 J4.3
PRX+2: length 20.6
  TOP w0.142: R53.2 50.86,19.47 51,19.33 51,18.5 51.15,18.36 52.26,18.36 52.36,18.26 52.78,18.26 52.92,18.4 52.92,18.61 52.5,19.03 52.5,19.51 52.9,19.91 53.38,19.91 53.97,19.31 54.16,19.31 54.38,19.53 54.38,19.73 53.28,20.83 53.28,24.84 53.92,25.48 57.18,25.48 57.56,25.1 57.56,23.73 57.78,23.51 J5.3
PRX+5: length 28.2
  TOP w0.142: T1.11 5.59,20.98 4.54,22.03 3.73,22.03 3.58,21.88 3.58,21.31 4.01,20.88 4.01,20.31 3.58,19.89 3.58,19.32 4.01,18.89 4.01,18.32 3.58,17.9 3.58,9.15 6.06,6.67 11.93,6.67 12.15,6.45 12.15,6.07 12.61,5.61 J3.2
PRX-1: length 23.3
  TOP w0.142: R48.2 50.99,3.87 51.22,4.11 51.76,4.11 52.24,4.59 52.24,6.3 52.38,6.45 54.2,6.45 54.53,6.78 54.53,7.35 54.2,7.68 52.38,7.68 52.24,7.82 52.24,8.76 52.88,9.4 54.16,9.4 54.23,9.33 54.23,9.33 54.3,9.26 54.87,9.26 54.94,9.33 54.94,9.33 55.01,9.4 55.58,9.4 55.65,9.33 55.65,9.33 55.72,9.26 56.29,9.26 56.36,9.33 56.36,9.33 56.43,9.4 56.71,9.4 57.44,8.67 57.44,8.37 57.37,8.29 57.36,8.29 57.29,8.21 57.29,7.65 57.36,7.57 57.37,7.57 57.44,7.49 57.44,6.92 57.37,6.85 57.36,6.85 57.29,6.77 57.29,6.2 57.36,6.13 57.37,6.13 57.44,6.05 57.44,5.48 57.37,5.41 57.36,5.41 57.29,5.33 57.29,4.76 57.36,4.68 57.37,4.68 57.44,4.61 57.44,4.06 57.3,3.91 J4.4
PRX-2: length 20.5
  TOP w0.142: J5.4 57.01,23.51 57.23,23.73 57.23,24.96 57.04,25.15 56.77,25.15 56.69,25.07 56.69,25.07 56.61,25 56.05,25 55.97,25.07 55.97,25.07 55.89,25.15 55.32,25.15 55.25,25.07 55.25,25.07 55.17,25 54.6,25 54.53,25.07 54.53,25.07 54.45,25.15 54.06,25.15 53.61,24.7 53.61,24.43 53.71,24.33 53.71,24.33 53.81,24.22 53.81,23.66 53.71,23.55 53.71,23.55 53.61,23.45 53.61,22.88 53.71,22.78 53.71,22.78 53.81,22.68 53.81,22.11 53.71,22.01 53.71,22.01 53.61,21.91 53.61,20.97 53.87,20.71 54,20.72 54.12,20.72 54.52,20.31 54.52,20.07 54.71,19.87 54.71,19.39 54.3,18.98 53.83,18.98 53.24,19.58 53.04,19.58 52.83,19.37 52.83,19.17 53.25,18.74 53.25,18.26 52.92,17.92 52.22,17.92 52.12,18.03 51.15,18.03 51,17.88 51,17.06 R54.2
PRX-5: length 28.1
  TOP w0.142: J3.1 11.36,5.61 11.82,6.07 11.82,6.31 11.79,6.34 5.92,6.34 3.25,9.01 3.25,22.02 3.59,22.36 4.54,22.36 5.7,23.52 T1.9
PTX1N: length 4.2
  TOP w0.142: T3.14 47.85,9.41 48.9,10.46 50.16,10.46 50.26,10.37 R46.1
PTX1P: length 4.3
  TOP w0.142: R45.1 50.26,10.98 50.12,10.84 50.07,10.79 48.9,10.79 47.74,11.95 T3.16
PTX2N: length 4
  TOP w0.142: T4.14 47.78,23.27 48.82,24.32 49.9,24.32 50.04,24.17 50.04,23.23 R52.1
PTX2P: length 4.1
  TOP w0.142: R51.1 50.04,24.79 49.9,24.65 49.15,24.65 47.98,25.81 T4.16
PTX+1: length 22.6
  TOP w0.142: R45.2 51.24,11.79 51.24,10.98 51.38,10.84 63.38,10.84 65.44,8.79 65.44,4.14 65.66,3.91 J4.1
PTX+2: length 20.4
  TOP w0.142: J5.1 65.44,23.51 65.22,23.73 65.22,25.97 64.68,26.52 53.59,26.52 51.72,24.65 51.17,24.65 51.02,24.79 51.02,25.59 50.88,25.73 R51.2
PTX+5: length 28.3
  TOP w0.142: J3.4 15.11,5.37 14.52,5.96 14.52,6.9 14.01,7.42 11.44,7.42 11.25,7.61 10.68,7.61 10.49,7.42 9.92,7.42 9.72,7.61 9.15,7.61 8.96,7.42 8.39,7.42 8.2,7.61 7.63,7.61 7.44,7.42 6.53,7.42 5.96,7.99 5.96,8.19 6.99,9.22 6.99,9.69 6.58,10.1 6.11,10.1 5.07,9.07 4.87,9.07 4.44,9.5 4.44,10.49 4.58,10.63 5.05,10.63 5.39,10.97 5.39,11.53 5.05,11.87 4.58,11.87 4.44,12.01 4.44,12.3 4.58,12.44 5.05,12.44 5.39,12.77 5.39,13.34 5.05,13.67 4.58,13.67 4.44,13.82 4.44,15.41 4.65,15.62 4.85,15.62 5.84,14.63 T1.16
PTX-1: length 22.6
  TOP w0.142: J4.2 64.87,3.91 65.1,4.15 65.1,4.55 64.95,4.7 64.95,4.7 64.79,4.86 64.79,5.43 64.95,5.58 64.95,5.58 65.1,5.74 65.1,6.3 64.95,6.46 64.95,6.46 64.79,6.61 64.79,7.18 64.95,7.34 64.95,7.34 65.1,7.49 65.1,8.65 63.24,10.51 51.38,10.51 51.24,10.37 51.24,9.56 51.09,9.42 R46.2
PTX-2: length 20.4
  TOP w0.142: R52.2 51.02,23.38 51.02,24.17 51.17,24.32 51.86,24.32 53.73,26.19 58.74,26.19 58.93,25.99 59.5,25.99 59.7,26.19 60.26,26.19 60.46,25.99 61.03,25.99 61.22,26.19 61.79,26.19 61.98,25.99 62.55,25.99 62.74,26.19 63.31,26.19 63.51,25.99 64.07,25.99 64.27,26.19 64.54,26.19 64.89,25.83 64.89,23.65 64.75,23.51 J5.2
PTX-5: length 28.4
  TOP w0.142: T1.14 5.95,17.17 4.73,15.95 4.51,15.95 4.11,15.55 4.11,13.68 4.44,13.34 4.91,13.34 5.06,13.2 5.06,12.91 4.91,12.77 4.44,12.77 4.11,12.44 4.11,11.87 4.44,11.54 4.91,11.54 5.06,11.39 5.06,11.11 4.91,10.97 4.44,10.97 4.11,10.63 4.11,9.36 4.73,8.74 5.21,8.74 6.25,9.77 6.44,9.77 6.66,9.55 6.66,9.36 5.62,8.33 5.62,7.85 6.39,7.08 13.87,7.08 14.19,6.76 14.19,5.86 13.86,5.54 J3.3
PTX-6: length 2.7
  TOP w0.152: v1(24.25,21.3) 24.82,21.3 25.04,21.52 U3.22
  BOTTOM w0.152: v1(24.25,21.3) 24.81,21.3 R14.1
PTX-7: length 1.8
  TOP w0.152: v1(25.06,15.95) 25.14,16.04 25.22,16.04 25.43,16.24 U3.34
  BOTTOM w0.152: v1(25.06,15.95) 25.14,16.04 25.22,16.04 25.39,16.21 R13.1
REG_OUT: length 5.4
  TOP w0.152: U3.66 v1(34.23,22.32) ; U3.55 v1(34.39,17.92) ; U3.21 25.4,21.9 24.65,21.9 24.59,21.84 v1(24.58,21.84)
  BOTTOM w0.152: C28.1 33.69,22.32 v1(34.23,22.32) ; v1(34.39,17.92) 33.52,17.92 C27.1 ; v1(24.58,21.84) 24.59,21.84 24.65,21.9 C29.1
  vias: v1(23.6,24.43) v1(23.62,23.8) v1(23.63,23.16) v1(23.65,22.53) v1(23.67,21.89)
RESET: length 4.2
  TOP w0.152: R25.2 24.51,13.39 24.52,13.39 C16.2 24.97,14.37 26.23,15.62 U3.35
RSVD_GMAC_FILTER: length 10.6
  TOP w0.152: RA6.1 33.32,13.94 v1(33.23,13.94) 32.58,13.94 32.4,14.12 31.78,14.12 30.71,15.19 30.71,15.84 U3.46
  BOTTOM w0.152: v1(33.23,13.94) 32.1,12.81 32.1,11.41 30.38,9.7 R20.1
RXIM1: length 27.4
  TOP w0.142: U3.64 33.44,21.54 34.98,21.54 v1(35.28,21.23) ; v1(34.97,5.33) 35.27,5.64 35.69,5.64 35.83,5.49 35.83,4.53 36.17,4.2 36.62,4.2 36.64,4.19 36.77,4.19 37.89,3.06 T3.8
  BOTTOM w0.142: v1(34.97,5.33) 35.28,5.64 36.06,5.64 36.93,6.51 36.93,10.87 37.88,11.82 37.88,14.71 36.49,16.1 36.49,19.05 34.63,20.91 34.63,21.4 34.77,21.54 34.97,21.54 v1(35.28,21.23)
RXIM2: length 13.1
  TOP w0.142: U3.68 35.98,23.12 v1(36.29,23.43) ; T4.8 37.98,16.92 36.73,18.17 36.73,20.95 36.58,21.09 36.42,21.09 v1(36.11,20.78)
  BOTTOM w0.142: v1(36.11,20.78) 36.42,21.09 36.94,21.09 37.28,21.43 37.28,22.79 36.94,23.12 36.6,23.12 v1(36.29,23.43)
RXIM3: length 29.3
  TOP w0.142: v1(17.75,36.77) 17.42,36.45 17.15,36.45 16.03,37.57 T2.8 ; v1(30.91,25.51) 30.59,25.19 30.59,24.62 30.62,24.59 U3.6
  BOTTOM w0.142: v1(30.91,25.51) 30.6,25.82 30.6,26.22 30.55,26.27 30.55,26.76 29.83,27.48 23.42,27.48 23.09,27.14 23.09,27.11 22.95,26.96 22.66,26.96 22.52,27.11 22.52,27.14 22.18,27.48 18.92,27.48 18.36,28.04 18.36,34.46 18.93,35.03 18.93,36.13 18.59,36.46 18.06,36.46 v1(17.75,36.77)
RXIM5: length 23.1
  TOP w0.142: U3.19 24.76,22.72 24.72,22.69 24.52,22.69 24.43,22.78 24.43,24.72 23.93,25.22 23.64,25.22 23.28,25.58 22.6,25.58 22.24,25.22 21.84,25.22 21.48,25.58 20.79,25.58 20.43,25.22 20.09,25.22 19.64,24.77 19.44,24.77 18.5,25.71 18.03,25.71 17.61,25.3 17.61,24.83 18.92,23.52 19.19,23.52 19.34,23.38 19.34,23.03 18.74,22.43 18.36,22.43 18.22,22.57 18.22,23.67 17.65,24.23 17.17,24.23 16.76,23.82 16.76,23.34 17.25,22.85 17.25,22.38 17.23,22.35 17.13,22.35 15.97,23.52 T1.8
RXIP1: length 27.4
  TOP w0.142: U3.65 33.83,21.92 33.88,21.87 34.97,21.87 v1(35.28,22.18) ; v1(34.97,6.28) 35.28,5.97 35.83,5.97 36.17,5.63 36.17,4.67 36.31,4.53 36.62,4.53 36.64,4.55 36.77,4.55 37.82,5.6 T3.6
  BOTTOM w0.142: v1(34.97,6.28) 35.27,5.97 35.92,5.97 36.59,6.65 36.59,11.01 37.55,11.96 37.55,14.57 36.16,15.96 36.16,18.91 34.3,20.77 34.3,21.54 34.63,21.87 34.98,21.87 v1(35.28,22.18)
RXIP2: length 11.1
  TOP w0.142: T4.6 37.69,19.46 37.24,19.01 37.06,19.01 37.06,21.09 36.72,21.42 36.42,21.42 v1(36.11,21.73) ; v1(36.29,22.48) 35.98,22.79 33.49,22.79 U3.67
  BOTTOM w0.142: v1(36.11,21.73) 36.42,21.42 36.8,21.42 36.95,21.57 36.95,22.65 36.8,22.79 36.6,22.79 v1(36.29,22.48)
RXIP3: length 29.2
  TOP w0.142: v1(29.96,25.51) 30.26,25.21 30.26,24.62 30.23,24.59 U3.7 ; T2.6 16.07,35.03 17.15,36.11 17.46,36.11 v1(17.75,35.82)
  BOTTOM w0.142: v1(17.75,35.82) 18.05,36.13 18.45,36.13 18.59,35.99 18.59,35.17 18.02,34.6 18.02,27.9 18.78,27.15 22.04,27.15 22.19,27.01 22.19,26.97 22.52,26.63 23.09,26.63 23.42,26.97 23.42,27.01 23.56,27.15 25.31,27.15 25.51,26.94 26.08,26.94 26.29,27.15 26.86,27.15 27.07,26.94 27.64,26.94 27.85,27.15 28.41,27.15 28.62,26.94 29.19,26.94 29.4,27.15 29.7,27.15 30.22,26.62 30.22,26.13 30.27,26.08 30.27,25.82 v1(29.96,25.51)
RXIP5: length 23.1
  TOP w0.142: T1.6 15.99,20.98 16.34,21.34 16.69,21.34 17.59,22.24 17.59,22.99 17.09,23.48 17.09,23.68 17.31,23.9 17.51,23.9 17.89,23.53 17.89,22.43 18.22,22.1 18.88,22.1 19.67,22.89 19.67,23.52 19.33,23.85 19.06,23.85 17.95,24.97 17.95,25.16 18.17,25.38 18.36,25.38 19.3,24.44 19.78,24.44 20.23,24.88 20.57,24.88 20.93,25.25 21.34,25.25 21.7,24.88 22.38,24.88 22.74,25.25 23.14,25.25 23.5,24.88 23.79,24.88 24.1,24.58 24.1,22.64 24.38,22.35 24.72,22.35 24.76,22.32 U3.20
TXOM1: length 27.5
  TOP w0.142: U3.62 34.09,20.72 34.12,20.75 34.33,20.75 35.87,19.21 35.87,16.05 36.39,15.53 36.87,15.53 37.37,16.03 37.56,16.03 37.78,15.81 37.78,15.62 37.41,15.26 37.41,14.54 37.75,14.2 41.78,14.2 41.93,14.06 41.93,13.78 41.78,13.63 41.36,13.63 41.02,13.3 41.02,12.94 40.88,12.8 40.59,12.8 40.45,12.94 40.45,13.3 40.12,13.63 39.55,13.63 39.22,13.3 39.22,12.94 39.08,12.8 38.79,12.8 38.65,12.94 38.65,13.3 38.31,13.63 37.75,13.63 37.41,13.3 37.41,12.21 36.93,11.72 36.93,10.87 36.93,10.87 36.93,10.06 37.57,9.41 T3.3
TXOM2: length 13.4
  TOP w0.142: U3.2 32.22,23.38 32.3,23.3 32.83,23.3 33.01,23.49 33.11,23.49 33.72,24.1 34.27,24.1 34.43,23.93 34.9,23.93 35.31,24.35 35.31,24.82 35.15,24.98 35.15,25.18 36.1,26.13 36.1,26.41 36.24,26.56 36.94,26.56 37.08,26.41 37.08,25.94 36.94,25.79 36.4,25.79 36.07,25.46 36.07,24.8 36.37,24.5 36.48,24.44 36.69,24.34 36.88,24.34 37.95,23.27 T4.3
TXOM3: length 29.1
  TOP w0.142: v1(18.96,30.45) 18.65,30.14 17.03,30.14 15.95,31.22 T2.3 ; v1(34.37,28.87) 34.51,28.74 34.51,28.68 34.65,28.54 34.93,28.54 35.26,28.2 35.26,26.51 34.25,25.5 32.02,25.5 31.39,24.87 31.39,24.62 31.42,24.59 U3.4
  BOTTOM w0.142: v1(34.37,28.87) 34.07,28.57 21.35,28.57 19.79,30.14 19.27,30.14 v1(18.96,30.45)
TXOM5: length 22.6
  TOP w0.142: T1.3 15.89,17.17 16.75,16.31 16.95,16.31 17.09,16.45 17.09,17.72 v1(16.79,18.03) ; v1(19.8,26.67) 20.11,26.36 23.71,26.36 25.28,24.79 25.28,24.31 25.45,24.14 26.01,24.14 U3.17
  BOTTOM w0.142: v1(16.79,18.03) 17.03,18.27 17.03,25.31 18.08,26.37 19.49,26.37 v1(19.8,26.67)
TXOP1: length 25.3
  TOP w0.142: T3.1 37.89,11.95 37.75,12.09 37.75,13.16 37.89,13.3 38.17,13.3 38.32,13.16 38.32,12.8 38.65,12.47 39.22,12.47 39.55,12.8 39.55,13.16 39.69,13.3 39.98,13.3 40.12,13.16 40.12,12.8 40.45,12.47 41.02,12.47 41.35,12.8 41.35,13.16 41.5,13.3 41.92,13.3 42.26,13.64 42.26,14.2 41.92,14.54 37.89,14.54 37.75,14.68 37.75,15.12 38.11,15.48 38.11,15.95 37.7,16.36 37.23,16.36 36.73,15.87 36.53,15.87 36.2,16.19 36.2,16.64 36.29,16.74 36.3,16.74 36.39,16.83 36.39,17.4 36.3,17.49 36.29,17.49 36.2,17.58 36.2,18.15 36.29,18.24 36.3,18.24 36.39,18.33 36.39,18.9 36.3,18.99 36.29,18.99 36.2,19.08 36.2,19.35 35.46,20.1 35.46,20.41 35.05,20.81 34.74,20.81 34.47,21.09 34.12,21.09 34.09,21.12 U3.63
TXOP2: length 12.5
  TOP w0.142: U3.1 32.73,23.82 32.97,23.82 33.58,24.43 34.41,24.43 34.57,24.27 34.76,24.27 34.98,24.49 34.98,24.68 34.82,24.84 34.82,25.32 35.77,26.27 35.77,26.55 36.1,26.89 37.08,26.89 37.42,26.55 37.42,25.8 37.08,25.46 36.54,25.46 36.4,25.32 36.4,24.94 36.57,24.77 36.69,24.71 36.76,24.74 36.76,24.74 36.88,24.71 37.99,25.81 T4.1
TXOP3: length 29
  TOP w0.142: T2.1 15.9,28.68 17.03,29.81 18.65,29.81 v1(18.96,29.5) ; v1(34.38,27.93) 34.37,27.93 34.65,28.21 34.79,28.21 34.93,28.06 34.93,26.65 34.11,25.83 31.88,25.83 31.06,25.01 31.06,24.62 31.03,24.59 U3.5
  BOTTOM w0.142: v1(34.38,27.93) 34.36,27.93 34.05,28.24 33.34,28.24 33.2,28.1 33.2,28.09 33.05,27.95 32.48,27.95 32.34,28.09 32.34,28.1 32.2,28.24 31.63,28.24 31.49,28.1 31.49,28.09 31.35,27.95 30.78,27.95 30.63,28.09 30.63,28.1 30.49,28.24 21.21,28.24 19.65,29.81 19.26,29.81 v1(18.96,29.5)
TXOP5: length 22.7
  TOP w0.142: v1(19.8,25.72) 20.11,26.03 23.57,26.03 24.95,24.65 24.95,24.17 25.21,23.9 25.21,23.33 U3.18 ; T1.1 15.89,14.63 17.43,16.16 17.43,17.72 v1(17.74,18.03)
  BOTTOM w0.142: v1(17.74,18.03) 17.36,18.4 17.36,25.17 18.22,26.03 19.49,26.03 v1(19.8,25.72)
VLAN_DIS: length 11.2
  TOP w0.152: U3.41 28.63,15.47 28.6,15.45 28.6,14.83 28.63,14.8 28.63,14.39 v1(28.78,14.24) 28.78,13.93 RA8.1
  BOTTOM w0.152: v1(28.78,14.24) 28.78,11.58 28.55,11.35 25.59,11.35 R15.1
WOL: length 4
  TOP w0.152: U3.51 32.63,16.53 32.45,16.7 v1(31.68,16.7)
  BOTTOM w0.152: v1(31.68,16.7) 32.41,15.98 RA1.1
X1: length 7
  TOP w0.203: C14.2 22.52,18.25 22.54,18.23 R17.1 23.2,17.62 23.3,17.52 U3.32
  TOP w0.254: C14.2 21.39,19.07 21.35,19.11 X1.1
X2: length 7.5
  TOP w0.203: U3.33 24.77,17.12 23.79,16.15 R17.2 22.54,15.2 22.54,15.19 C15.2
  TOP w0.254: X1.2 21.35,15.01 21.68,14.68 C15.2
N17412153: length 4.2
  TOP w0.152: v1(29.15,25.66) 29.48,25.34 29.48,25.33 29.83,24.97 29.83,24.53 29.83,24.53 U3.8
  BOTTOM w0.152: R28.1 29.83,24.97 29.48,25.33 29.48,25.34 v1(29.15,25.66)
N17412700: length 2.8
  TOP w0.152: D12.C v1(23.93,7.36)
  BOTTOM w0.152: R15.2 23.92,7.82 23.93,7.82 v1(23.93,7.36)
N17412952: length 2.8
  TOP w0.152: R26.2 27.56,13.8 27.56,14.77 27.43,14.9 27.43,14.9 27.37,14.96 27.37,15.86 U3.38
N17433481: length 2.3
  TOP w0.203: v1(16.48,29.94) 16.47,29.95 T2.2
  BOTTOM w0.203: C43.2 v1(16.48,29.94)
N17433488: length 2.3
  TOP w0.203: T2.7 16.38,36.3 16.39,36.29 v1(16.48,36.29)
  BOTTOM w0.203: C44.2 v1(16.48,36.29)
N17434052: length 2
  TOP w0.203: T4.2 37.36,24.54 v1(37.34,24.52)
  BOTTOM w0.203: C51.2 v1(37.34,24.52)
N17434056: length 2
  TOP w0.203: T4.7 v1(37.37,18.19)
  BOTTOM w0.203: C52.2 37.99,18.19 v1(37.37,18.19)
N17434086: length 2.8
  TOP w0.203: v1(45.9,24.55) 47.46,24.55 T4.15
  BOTTOM w0.203: R56.1 v1(45.9,24.55)
N17434090: length 2.7
  TOP w0.203: T4.10 v1(45.94,18.19)
  BOTTOM w0.203: R55.1 46.61,18.19 46.61,18.19 v1(45.94,18.19)
N17434094: length 16
  BOTTOM w0.203: 51.05,22.83 C53.2 ; 51.05,22.83 52.09,21.8 52.09,18.68 51.6,18.19 R55.2 ; 51.05,22.83 51.87,22.83 52.07,23.04 52.07,24.07 51.6,24.55 R56.2
N17434100: length 13.3
  BOTTOM w0.203: R49.2 49.55,4.39 50.41,5.25 C49.2 50.97,6.28 52.26,7.57 52.26,10.34 51.93,10.67 R50.2
N17434102: length 1.9
  TOP w0.152: T3.2 v1(37.38,10.68)
  BOTTOM w0.152: C47.2 v1(37.38,10.68)
N17434108: length 2.2
  TOP w0.152: v1(37.26,4.34) 37.26,4.33 T3.7
  BOTTOM w0.152: C48.2 v1(37.26,4.34)
N17434132: length 2.8
  TOP w0.203: T3.15 47.45,10.67 v1(45.93,10.67)
  BOTTOM w0.203: R50.1 v1(45.93,10.67)
N17434136: length 3
  TOP w0.203: T3.10 47.41,4.39 v1(45.88,4.39)
  BOTTOM w0.203: R49.1 v1(45.88,4.39)
N17434150: length 3
  BOTTOM w0.203: C50.2 48.81,8.96 48.82,8.98 C49.1
N17434164: length 3
  BOTTOM w0.203: C54.2 49.04,20.13 49.06,20.14 C53.1
N17436281: length 14.3
  BOTTOM w0.203: R38.2 4.39,15.9 3.24,17.05 C41.2 1.8,17.94 1.3,18.44 1.3,21.79 1.8,22.29 R37.2
N17436283: length 2
  TOP w0.152: T1.2 16.48,15.9 v1(16.49,15.9)
  BOTTOM w0.203: v1(16.49,15.9) C39.2
N17436287: length 2
  TOP w0.203: T1.7 16.45,22.25 v1(16.46,22.26)
  BOTTOM w0.203: C40.2 v1(16.46,22.26)
N17436311: length 2.3
  TOP w0.203: T1.15 7.71,15.9 v1(7.71,15.9)
  BOTTOM w0.203: R38.1 v1(7.71,15.9)
N17436315: length 2.6
  TOP w0.203: T1.10 v1(7.82,22.25)
  BOTTOM w0.203: v1(7.82,22.25) 7.21,22.25 7.17,22.29 R37.1
N17436327: length 3.1
  BOTTOM w0.203: C42.2 C41.1
N17440593: length 11.9
  TOP w0.381: U2.6 50.25,30.39 50.15,30.29 C12.1 49.7,29.72 v1(49.1,29.12) ; R4.2 v1(50.08,36.48)
  POWER w0.381: v1(50.08,36.48) 50.08,30.1 v1(49.1,29.12)
N17440661: length 7.3
  TOP w0.381: U2.8 v1(51.55,30.87) ; v1(45.92,30.87) 45.14,30.87 R10.1
  BOTTOM w0.381: v1(51.55,30.87) v1(45.92,30.87)
N17440667: length 3.3
  TOP w0.381: R10.2 43.49,31.25 R12.1 42.24,31.26 R8.2
N17440673: length 2.9
  TOP w0.381: R3.1 48.63,29.54 48.95,29.86 48.95,29.86 49.6,30.51 U2.5
N17440679: length 3.9
  TOP w0.381: v1(52.64,33.29) 52.28,33.29 U2.1
  BOTTOM w0.381: v1(52.64,33.29) 52.3,33.29 R9.2
  BOTTOM w0.508: R11.1 51.56,32.52 R9.2
N17440691: length 4.2
  TOP w0.381: v1(50.9,32.55) U2.7 50.9,30.08 C13.1
  BOTTOM w0.381: R9.1 51.4,31.72 50.9,32.22 v1(50.9,32.55)
N17440701: length 8.5
  TOP w0.381: C5.2 48.01,31.16 47.74,31.42 L1.1 47.74,34.97 48.31,35.53 49.87,35.53 50.25,35.15 U2.3
N17502744: length 3.7
  TOP w0.508: D10.3 19.71,36.75 20.03,36.43 C8.1 20.02,35.19 R6.2
N17502755: length 11.8
  TOP w0.508: R7.2 20.84,34.13 R6.1 22.33,35.64 D9.1
N17504821: length 13.9
  BOTTOM w0.203: R43.2 2.04,36.3 1.18,35.44 1.18,33.38 2.62,31.94 C45.2 3.18,31.06 4.24,30 R44.2
N17504827: length 2.4
  TOP w0.203: v1(7.77,30) 6.43,30 T2.15
  BOTTOM w0.203: R44.1 v1(7.77,30)
N17504829: length 2.5
  TOP w0.203: v1(7.81,36.3) T2.10
  BOTTOM w0.203: R43.1 v1(7.81,36.3)
N17504837: length 3.1
  BOTTOM w0.203: C45.1 4.71,34.63 4.77,34.56 C46.2
N17505926: length 3.7
  TOP w0.508: v1(16.26,6.33) 16.26,4.93 J3.5
  BOTTOM w0.508: v1(16.26,6.33) LB4.1 LB3.1
N17505929: length 3.8
  TOP w0.508: J3.6 v1(17.61,6.37)
  BOTTOM w0.508: LB5.1 19.05,7.38 LB6.1 17.61,7.05 v1(17.61,6.37)
N17505945: length 11.4
  TOP w0.508: D21.2 8.55,10.38 8.55,10.38 v1(8.55,11.28)
  BOTTOM w0.508: LB4.2 16.26,9.73 15.82,10.16 9.66,10.16 v1(8.55,11.28)
N17510151: length 5.3
  TOP w0.508: v1(19.06,11.4) 19.06,10.08 D22.2
  BOTTOM w0.508: LB5.2 v1(19.06,11.4)
N18156035: length 13.1
  TOP w0.508: R2.2 54.71,38.58 v1(55.64,37.65) ; U1.1 55.64,46.31 v1(55.64,45.71)
  BOTTOM w0.508: v1(55.64,37.65) v1(55.64,45.71)
N18156037: length 17.1
  TOP w0.508: C3.2 v1(54.81,46.7) ; v1(65.1,51.77) 66.35,51.77 C1.2
  BOTTOM w0.508: v1(54.81,46.7) 60.02,46.7 v1(65.1,51.77)
N175169961: length 3.3
  TOP w0.508: J6.2 34.44,37.51 34.86,37.09 R57.2

## Copper pours and planes (outline as drawn; the poured copper is in the pictures)
3V3_BD on TOP: 37.6,35.71 38.22,35.71 38.4,35.53 38.4,34.6 39.08,33.92 42.98,33.92 43.09,34.03 43.09,36.04 43.44,36.39 44.66,36.39 44.87,36.18 44.87,31.98 44.75,31.86 43.2,31.86 43.08,31.99 43.08,32.68 42.92,32.84 40.36,32.84 39.96,32.43 32.78,32.43 32.78,32.42 32.54,32.17 32.54,30.9 32.05,30.41 29.57,30.41 29.09,30.89 29.09,32.27 28.92,32.43 27.24,32.43 27.12,32.55 27.12,33.83 27.23,33.94 27.23,33.95 27.33,34.04 33.86,34.04 34.1,34.28 34.1,34.76 34.27,34.93 37.39,34.93 37.49,35.02 37.49,35.59 37.48,35.59
12V0 on TOP: 24.01,41.91 29.54,41.91 30.39,42.76 31.47,42.76 31.47,42.73 31.77,42.42 31.77,39.58 31.45,39.26 30.37,39.26 29.47,38.37 29.47,37.52 29.43,37.48 24.01,37.48 23.78,37.7 23.78,41.6 23.74,41.64
12V0 on TOP: 11.89,7.92 16.62,7.92 16.84,8.14 16.84,11.45 16.02,12.27 12.05,12.27 11.59,11.8 11.59,8.22
12V0 on TOP: 50.79,36.01 55.17,36.01 55.31,36.15 57.47,36.15 57.5,36.12 57.5,31.41 57.4,31.31 54.79,31.31 54.54,31.56 54.54,34.02 53.79,34.77 51.23,34.77 51.13,34.67 51.13,33.41 51.05,33.33 50.69,33.33 50.63,33.4 50.63,35.84
12V0 on POWER: 54.36,31.29 58.17,31.29 60.07,33.19 60.07,43.88 58.67,45.29 3.77,45.29 1.18,42.7 1.18,9.05 2.87,7.36 8.42,7.36 14.8,0.98 27.32,0.98 27.61,1.27 27.61,3.05 26.99,3.67 20.44,3.67 15.97,8.15 15.97,11.81 15.16,12.62 4.7,12.62 4.37,12.95 4.37,39.13 5.9,40.67 29.1,40.67 30.18,39.59 49.4,39.59 53.92,35.07 53.92,31.72
AV10 on TOP: 21.96,21.63 19.18,21.63 19.06,21.51 19.06,20.94 19.19,20.81 21.95,20.81 22.02,20.89 22.02,21.56
AV10 on POWER: 20.61,21.65 21.11,21.65 21.39,21.36 21.39,16.86 22.25,16 26.28,16 26.99,16.71 33.92,16.71 34.06,16.85 34.06,17.26 34.19,17.39 34.7,17.39 34.82,17.27 34.82,16.02 34.58,15.78 27.42,15.78 27.05,15.41 27.05,15.07 26.62,14.64 20.72,14.64 20.3,15.06 20.3,20.74 20.25,20.79 20.25,20.81 19.18,20.81 19.05,20.93 19.05,21.51 19.18,21.64 20.6,21.64
AVCC on TOP: 25.8,26.41 26.21,26.01 26.21,25.66 26.3,25.57 26.6,25.57 26.67,25.49 26.67,25.01 26.62,24.96 25.53,24.96 24.19,26.3 24.19,29.45 23.78,29.85 23.78,33.54 24.09,33.85 26.35,33.85 26.55,33.65 26.55,30.24 25.8,29.49
AVCC on POWER: 27.5,25.17 39.49,25.17 39.88,24.78 39.88,5.7 39.23,5.05 34.7,5.05 34.56,5.19 34.56,6.7 35.74,7.88 35.74,17.71 35.12,18.32 33.95,18.32 33.74,18.53 33.74,21.53 34.01,21.8 34.37,21.8 34.82,22.25 34.82,23.39 34.36,23.85 26.48,23.85 25.63,24.7 22.99,24.7 22.91,24.62 22.91,21.78 24.91,19.79 24.91,19.31 24.81,19.21 24.36,19.21 21.32,22.24 21.32,26.26 21.81,26.75 25.92,26.75
DVCC on TOP: 30.98,30.06 30.98,27.3 30.99,27.3 31.39,26.9 32.97,26.9 32.98,26.9 34.23,26.9 34.38,26.75 34.38,26.25 34.26,26.13 30.91,26.13 30.7,26.35 30.7,26.49 29.75,27.44 29.75,28.14 29.5,28.39 26.35,28.39 26.3,28.45 26.3,29.73 26.78,30.22 26.79,30.22 26.92,30.35 26.92,31.46 27.26,31.8 28.52,31.8 28.64,31.67 28.64,30.56 28.93,30.28 30.76,30.28
DVCC on TOP: 36.26,9.61 36.4,9.75 36.4,10.56 36.22,10.75 21.71,10.75 21.66,10.7 21.66,9.67 21.73,9.61
